# Altium PCB GATE_BOARD.PcbDoc
Units mm, origin at the board's own origin, x right, y up, seen from the top; angles counter-clockwise.
Board outline 34 x 31 mm, 2 copper layers (Top Layer, Bottom Layer), stack 1.071 mm thick; 20 components, 10 nets, 36 pads, 0 vias.
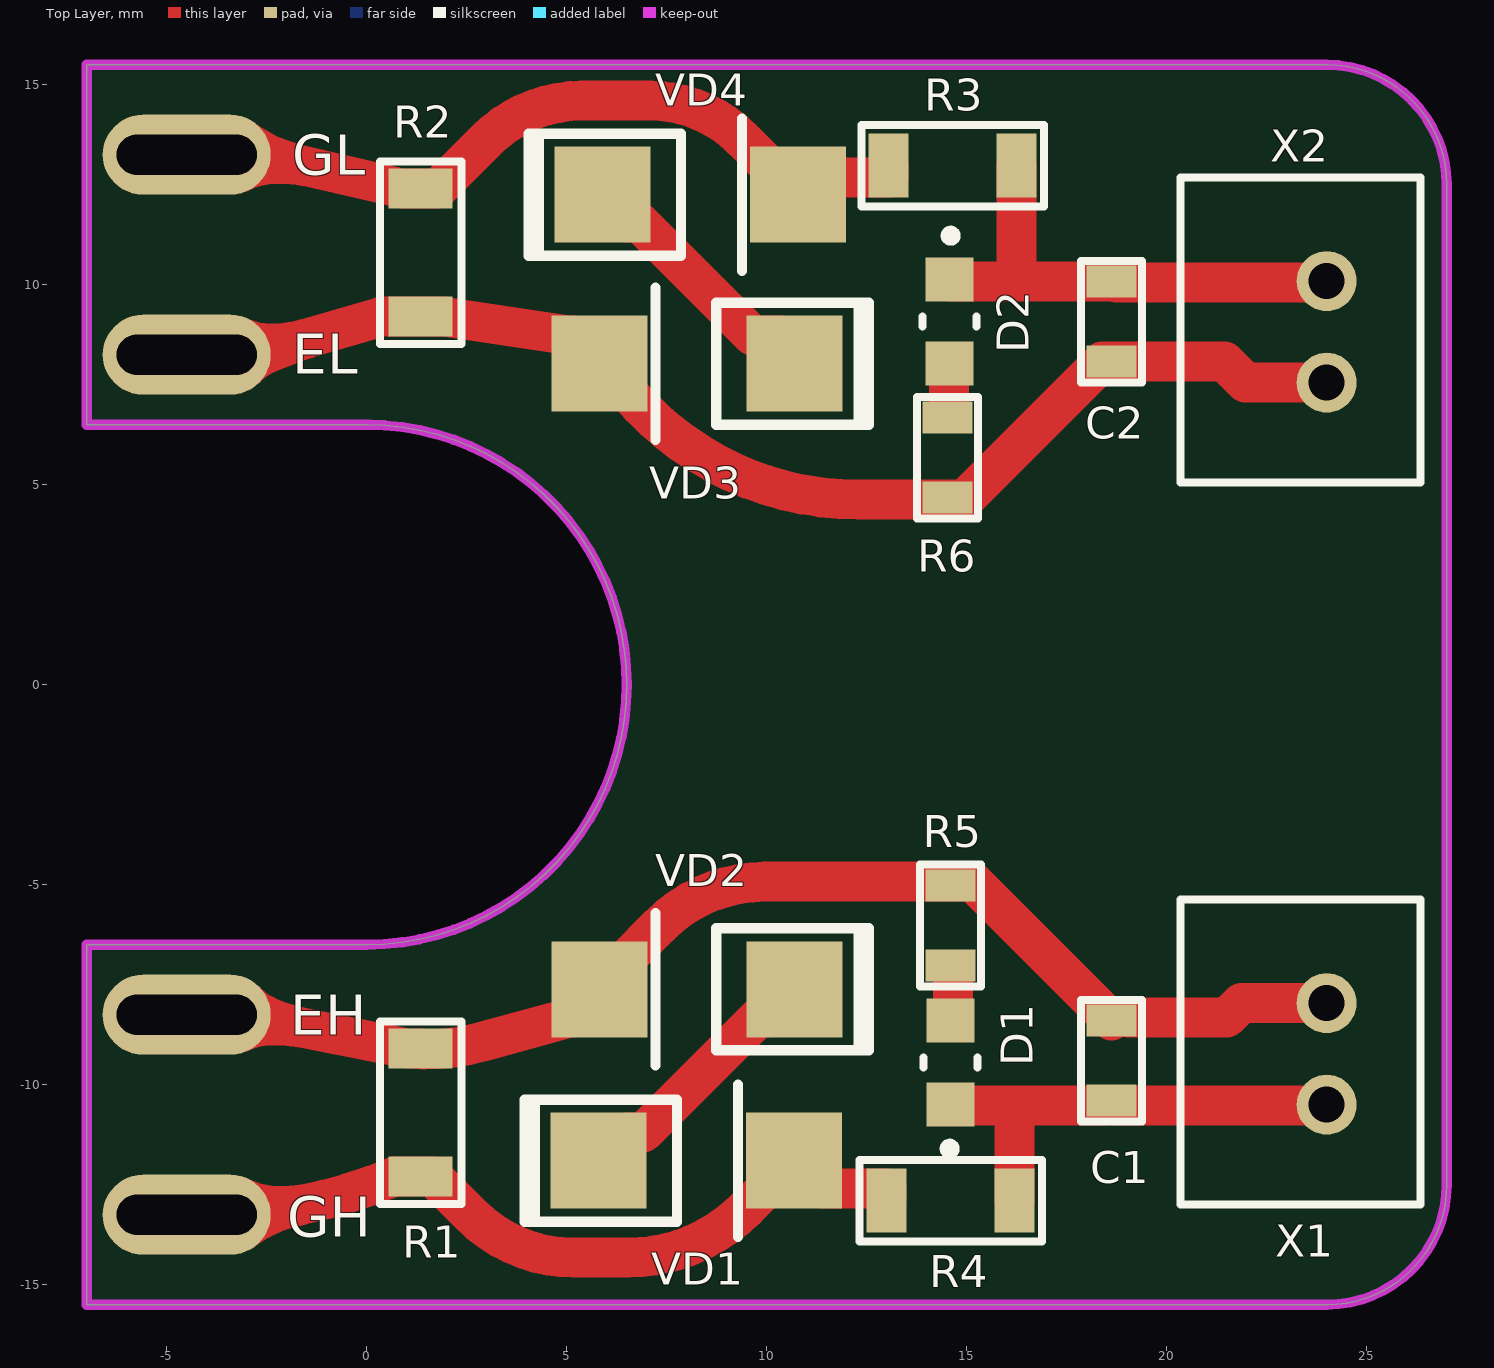
[diagram p0: Top Layer view]
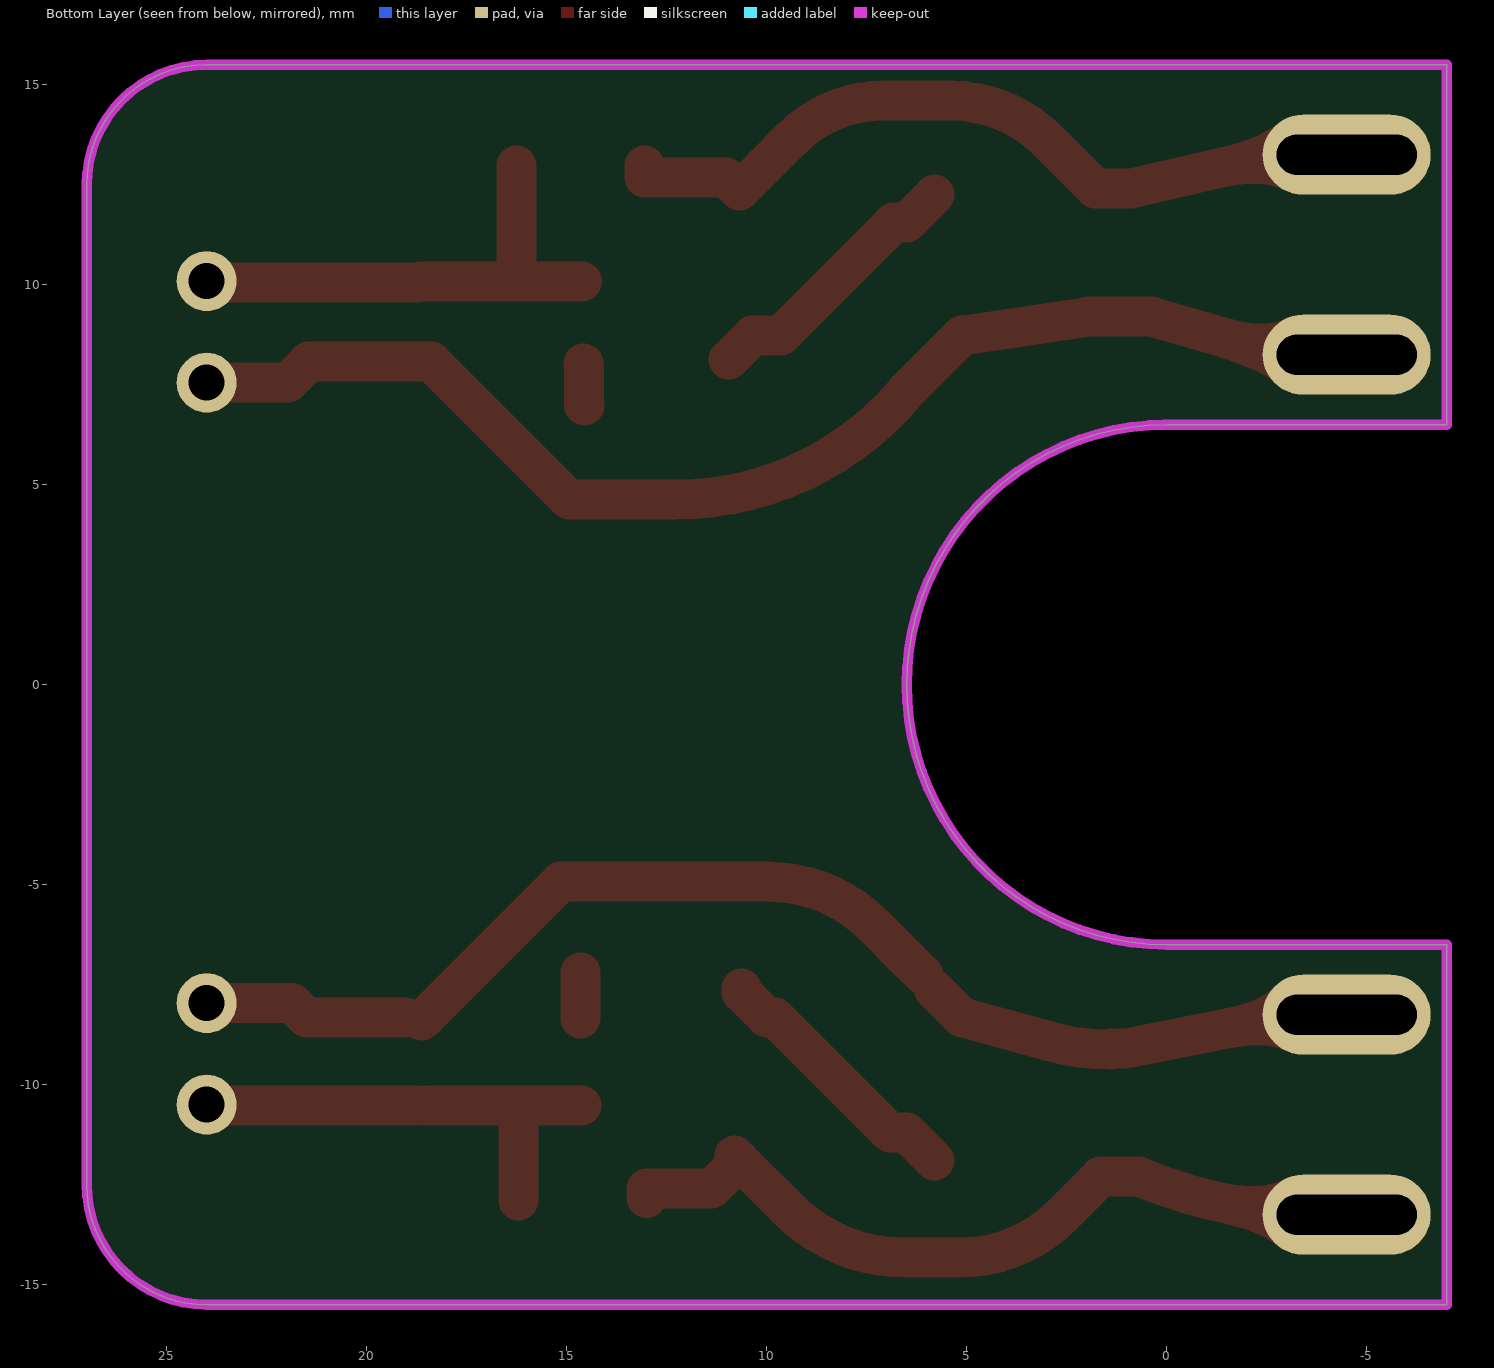
[diagram p1: Bottom Layer view, seen from below]
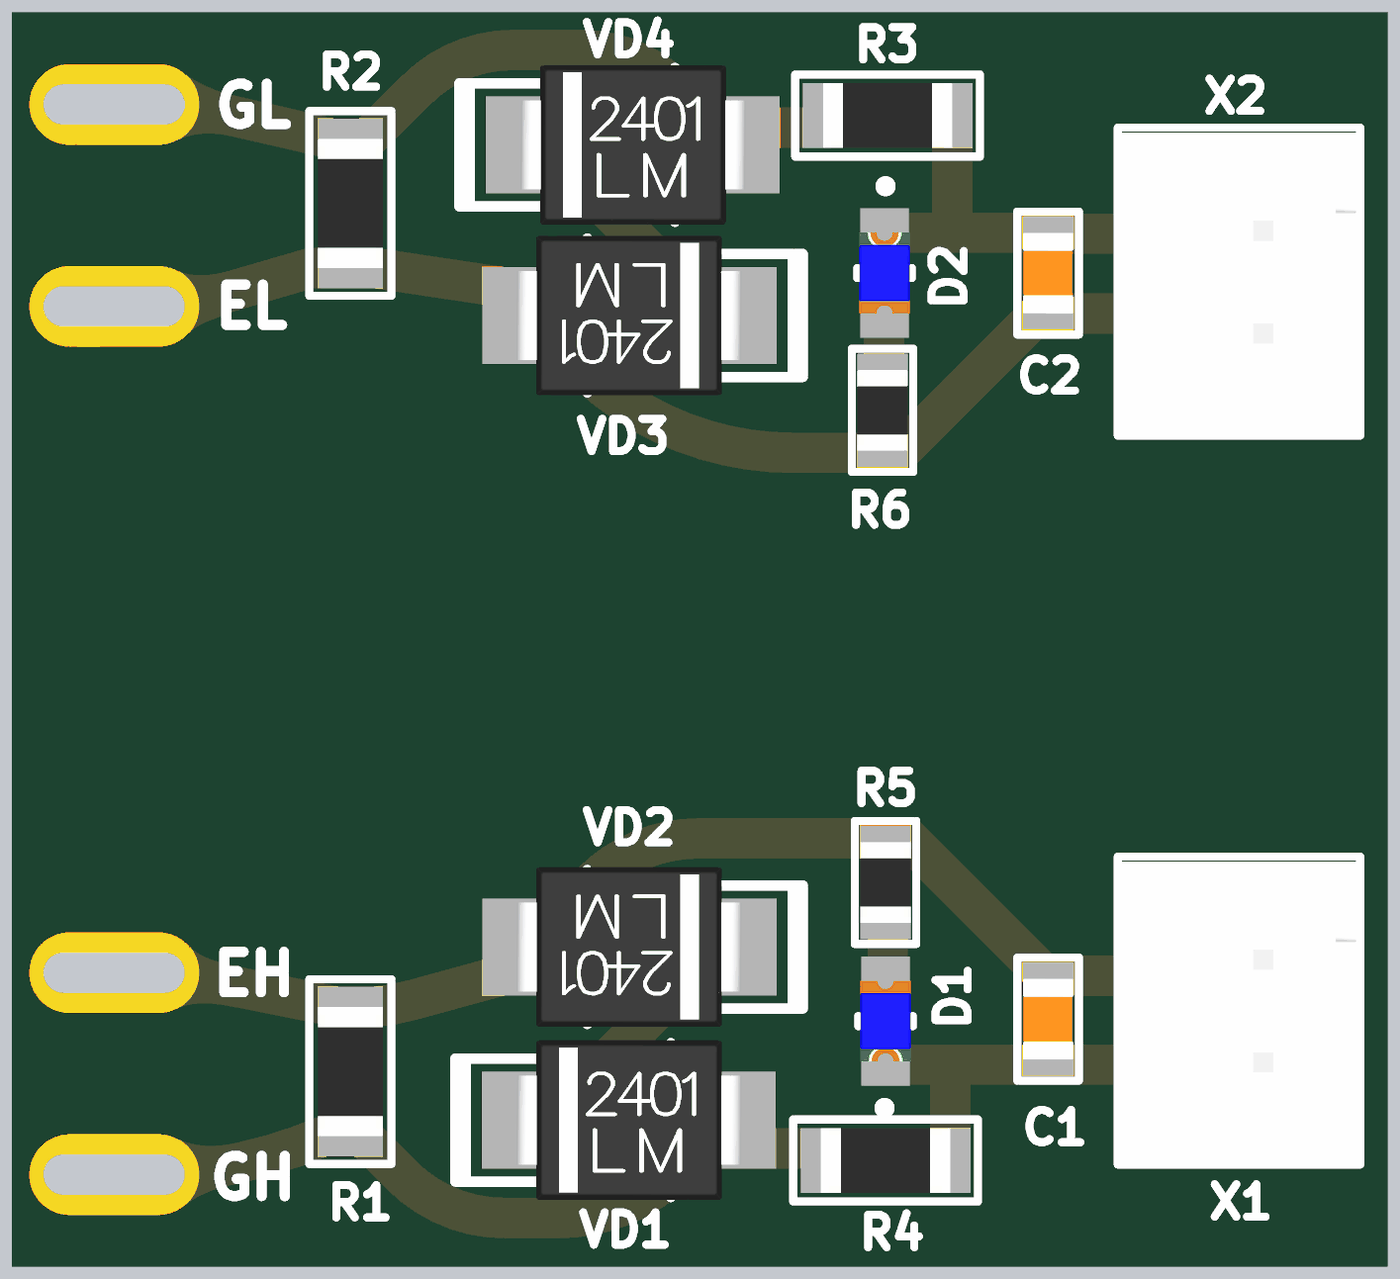
[diagram p2: 3D render of the assembled board from above, using the file's embedded part models]

## Layer stack, top to bottom
Top Solder: solder mask 0.0102, Solder Resist, Dk 3.5
Top Layer: signal copper 0.0356
Dielectric 1: dielectric 1, FR-4, Dk 4.8
Bottom Layer: signal copper 0.0356
Bottom Solder: solder mask 0.0102, Solder Resist, Dk 3.5

## Board outline
-7,-15.5 -7,-6.5 0,-6.5 ccw(c0,0) 0,6.5 -7,6.5 -7,15.5 24,15.5 cw(c24,12.5) 27,12.5 27,-12.5 cw(c24,-12.5) 24,-15.5

## Design rules (kind name [scope] priority, off if disabled: settings)
Clearance Clearance_1 [All vs InNet('GND_1')] p1: gap=0.2 ignorepadtopadclearanceinfootprint=FALSE
Clearance [All vs InNet('GND')] p2: gap=0.25 ignorepadtopadclearanceinfootprint=FALSE except(0.2: SMDPad-SMDPad SMDPad-THPad SMDPad-Via SMDPad-Fill SMDPad-Poly SMDPad-Region SMDPad-Text SMDPad-Hole THPad-THPad THPad-Via THPad-Fill THPad-Poly THPad-Region THPad-Text THPad-Hole Text-Text Text-Hole)
ComponentClearance [All] p1: gap=-3 collisioncheckmode=3 verticalgap=0.254 showdistances=FALSE
DiffPairsRouting [All] p1: maxlimit=0.254 minlimit=0.254 mostfreqgap=0.254 substack1={A23D90DD-733B-49C5-8102-56B3D284E3A0} toplayer_{a23d90dd-733b-49c5-8102-56b3d284e3a0}_minwidth=0.381 toplayer_{a23d90dd-733b-49c5-8102-56b3d284e3a0}_maxwidth=0.381 toplayer_{a23d90dd-733b-49c5-8102-56b3d284e3a0}_prefwidth=0.381 bottomlayer_{a23d90dd-733b-49c5-8102-56b3d284e3a0}_minwidth=0.381 bottomlayer_{a23d90dd-733b-49c5-8102-56b3d284e3a0}_maxwidth=0.381 bottomlayer_{a23d90dd-733b-49c5-8102-56b3d284e3a0}_prefwidth=0.381 toplayer_minwidth=0.381 toplayer_maxwidth=0.381 toplayer_prefwidth=0.381 bottomlayer_minwidth=0.381 bottomlayer_maxwidth=0.381 bottomlayer_prefwidth=0.381 substack2={0B3DB408-A969-412D-8C07-BA8AE97219D9} toplayer_{0b3db408-a969-412d-8c07-ba8ae97219d9}_minwidth=0.381 toplayer_{0b3db408-a969-412d-8c07-ba8ae97219d9}_maxwidth=0.381 toplayer_{0b3db408-a969-412d-8c07-ba8ae97219d9}_prefwidth=0.381 bottomlayer_{0b3db408-a969-412d-8c07-ba8ae97219d9}_minwidth=0.381 bottomlayer_{0b3db408-a969-412d-8c07-ba8ae97219d9}_maxwidth=0.381 bottomlayer_{0b3db408-a969-412d-8c07-ba8ae97219d9}_prefwidth=0.381 substack3={378827E6-B38F-4565-9D2F-710D8D441C30} toplayer_{378827e6-b38f-4565-9d2f-710d8d441c30}_minwidth=0.381 toplayer_{378827e6-b38f-4565-9d2f-710d8d441c30}_maxwidth=0.381 toplayer_{378827e6-b38f-4565-9d2f-710d8d441c30}_prefwidth=0.381 bottomlayer_{378827e6-b38f-4565-9d2f-710d8d441c30}_minwidth=0.381 bottomlayer_{378827e6-b38f-4565-9d2f-710d8d441c30}_maxwidth=0.381 bottomlayer_{378827e6-b38f-4565-9d2f-710d8d441c30}_prefwidth=0.381 substack4={1E65D4A7-266F-4925-B814-5E9C4A66F8EE} toplayer_{1e65d4a7-266f-4925-b814-5e9c4a66f8ee}_minwidth=0.381 toplayer_{1e65d4a7-266f-4925-b814-5e9c4a66f8ee}_maxwidth=0.381 toplayer_{1e65d4a7-266f-4925-b814-5e9c4a66f8ee}_prefwidth=0.381 bottomlayer_{1e65d4a7-266f-4925-b814-5e9c4a66f8ee}_minwidth=0.381 bottomlayer_{1e65d4a7-266f-4925-b814-5e9c4a66f8ee}_maxwidth=0.381 bottomlayer_{1e65d4a7-266f-4925-b814-5e9c4a66f8ee}_prefwidth=0.381 substack5={93C5D03E-862D-45F8-9871-970EEA9B3F11} toplayer_{93c5d03e-862d-45f8-9871-970eea9b3f11}_minwidth=0.381 toplayer_{93c5d03e-862d-45f8-9871-970eea9b3f11}_maxwidth=0.381 toplayer_{93c5d03e-862d-45f8-9871-970eea9b3f11}_prefwidth=0.381 bottomlayer_{93c5d03e-862d-45f8-9871-970eea9b3f11}_minwidth=0.381 bottomlayer_{93c5d03e-862d-45f8-9871-970eea9b3f11}_maxwidth=0.381 bottomlayer_{93c5d03e-862d-45f8-9871-970eea9b3f11}_prefwidth=0.381 maxuncoupledlength=12.7
Height [All] p1: minheight=0 maxheight=50 prefheight=33
HoleSize [All] p1: absolutevalues=TRUE maxlimit=6 minlimit=0.01 maxpercent=80.000 minpercent=20.000
HoleToHoleClearance [All] p1: gap=0.1 allowstackedmicrovias=TRUE
MinimumSolderMaskSliver [All] p1: minsoldermaskwidth=0.1
PlaneClearance [All] p1: clearance=0.7
PlaneConnect [All] p1: planeconnectstyle=Direct reliefexpansion=0.5 reliefentries=4 reliefconductorwidth=0.5 reliefairgap=0.15
PolygonConnect VQFN20 [HasFootprint('VQFN20')] p1: connectstyle=Direct reliefconductorwidth=0.254 reliefentries=4 polygonreliefangle="90 Angle" airgapwidth=0.254
PolygonConnect [All] p2: connectstyle=Direct reliefconductorwidth=0.3 reliefentries=4 polygonreliefangle="90 Angle" airgapwidth=0.15
RoutingVias [All] p1: holewidth=0.1 width=0.1 viastyle="Through Hole" minholewidth=0 minwidth=0.3 maxholewidth=2 maxwidth=4
ShortCircuit [All] p1: allowed=TRUE
SilkToSolderMaskClearance [IsPad] p1: minsilkscreentomaskgap=0.1 clearancetoexposedcopper=TRUE
SolderMaskExpansion SolderMaskExpansion_Via [IsVia] p1: expansion=0.102 istentingtop=TRUE
SolderMaskExpansion [All] p2: expansion=0.01 istentingtop=FALSE
UnRoutedNet [All] p1: checkbadconnections=TRUE
Width [All] p1: maxlimit=5 minlimit=0.2 preferedwidth=0.3 substack1={A23D90DD-733B-49C5-8102-56B3D284E3A0} substack2={0B3DB408-A969-412D-8C07-BA8AE97219D9} substack3={378827E6-B38F-4565-9D2F-710D8D441C30} substack4={1E65D4A7-266F-4925-B814-5E9C4A66F8EE} substack5={93C5D03E-862D-45F8-9871-970EEA9B3F11}
19 further rules are at their usual default settings.

## Components (designator, comment, footprint, x,y, rotation, side; value= is the part's Value field where it differs from the comment)
C1 "330" CAP-0805 18.625,-9.4 r270 top
C2 "330" CAP-0805 18.625,9.075 r270 top
D1 "LED" LED_BLUE 14.6,-9.45 r90 top
D2 "LED" LED_BLUE 14.575,9.075 r270 top
EH "" Test_Point#1 -2.7,-9.7 r0 top
EL "" Test_Point#2 -3,9.275 r0 top
GH "" Test_Point#3 -2.775,-12.775 r0 top
GL "" Test_Point#4 -3.35,12.975 r0 top
R1 "5.1K" RES-1206 1.35,-10.7 r270 top
R2 "5.1K" RES-1206 1.35,10.8 r90 top locked
R3 "5.1" RES-1206 14.65,12.975 r0 top
R4 "5.1" RES-1206 14.6,-12.9 r0 top
R5 "1K" RES-0805 14.6,-6.015 r90 top
R6 "1K" RES-0805 14.525,5.675 r270 top
VD1 "5.0V" DO-214AA 10.3,-11.9 r180 top
VD2 "5.0V" DO-214AA 6.2,-7.614 r0 top
VD3 "5.0V" DO-214AA 6.2,8.025 r0 top
VD4 "5.0V" DO-214AA 10.4,12.25 r180 top
X1 "CONN-2-PIN" CONN-PLS-2-2.54mm 24,-10.5 r90 top
X2 "CONN-2-PIN" CONN-PLS-2-2.54mm 24,7.551 r90 top

## Footprints (in the part's own frame and the unit in brackets; to place one, negate y for a bottom-side part, rotate by r counter-clockwise, add the part's x,y. Pads: shape width x height; smd on the part's side, far side on the other; paste and mask are expansions set on the pad)
CAP-0805 [mm]
  rect 0.8x1.25 smd mask+0.015: 1(-1,0) 2(1,0)
  silkscreen extent -1.52,-0.76 1.52,0.76, body extent -1,-0.62 1,0.63, height 0.8
CONN-PLS-2-2.54mm [mm]
  round 1.5 hole 0.9: 1(0,0) 2(2.54,0)
  silkscreen extent -2.5,-2.35 5.13,3.65, body extent -2.4,-2.25 5,3.55, height 7
DO-214AA [mm]
  rect 2.4x2.4 smd: 1(-0.381,0) 2(4.5,0)
  silkscreen extent 1.02,-1.91 6.35,1.91, body extent -0.75,-1.97 4.85,1.97, height 2.65
LED_BLUE [mm]
  rect 1.1x1.2 smd paste+0 mask+0: 1(-1.05,0) 2(1.05,0)
  silkscreen extent -2.27,-0.67 0.13,0.67, body extent -1,-0.63 1,0.63, height 0.8
RES-0805 [mm]
  rect 0.8x1.25 smd mask+0.015: 1(-1,0) 2(1,0)
  silkscreen extent -1.52,-0.76 1.52,0.76, body extent -1,-0.62 1,0.63, height 0.6
RES-1206 [mm]
  rect 1x1.6 smd: 1(-1.6,0) 2(1.6,0)
  silkscreen extent -2.29,-1.02 2.29,1.02, body extent -1.6,-0.8 1.6,0.8, height 0.6
Test_Point#1 [mm]
  oval 4.2x2 hole 1 slot 3.5 at 0 deg: 1(-1.8,1.45)
Test_Point#2 [mm]
  oval 4.2x2 hole 1 slot 3.5 at 0 deg: 1(-1.5,-1.025)
Test_Point#3 [mm]
  oval 4.2x2 hole 1 slot 3.5 at 0 deg: 1(-1.725,-0.475)
Test_Point#4 [mm]
  oval 4.2x2 hole 1 slot 3.5 at 0 deg: 1(-1.15,0.275)

## Part data
C1 C2: library part CAP-NON-POLAR
D1 D2: "WURTH ELEKTRONIK - 151031YS06000 - LED, Yellow, Through Hole, T-1 (3mm), 30 mA, 2 V, 590 nm", Manufacturer_Name="Wurth Elektronik", Manufacturer_Part_Number=151031YS06000, Mouser Part Number=710-151031YS06000, Datasheet Link=https://katalog.we-online.de/led/datasheet/151031YS06000.pdf, Geometry.Height=5.5mm, Mouser Price/Stock=https://www.mouser.co.uk/ProductDetail/Wurth-Elektronik/151031YS06000?qs=LlUlMxKIyB3xSYYW%252BcuBiQ%3D%3D
EH EL GH GL: library part TP_PCB?, "Test_Point"
R1 R2 R3 R4 R5 R6: library part RES-CONST
VD1 VD2 VD3 VD4: library part SMBJ15A

## Nets (pads, with @x,y where several pads share a name; then routed paths per layer and width w, separated by ;. In a path a pad name is that pad's centre, name@x,y a point inside that pad or via, vN(x,y) a via of type N, cw(c..) or ccw(c..) an arc to the next point about the centre after c; other vN are vias at no path point)
E_H: C1.1 EH.1 R1.1 R5.2 VD2.1 X1.2 | length 30.6
  Top Layer w1: EH.1 -4.235,-8.25 -4.16,-8.175 -3.625,-8.175 1.05,-9.1 R1.1 ; R1.1@1.405,-9.123 ccw(c1.401,-3.423) 2.909,-8.92 5.119,-8.314 VD2.1 ; VD2.1@6.081,-7.263 6.444,-6.9 7.329,-6.015 cw(c9.961,-8.649) 9.961,-4.925 R5.2@14.51,-4.925 ; R5.2@14.6,-4.925 15.15,-4.925 18.5,-8.275 18.5,-8.3 18.525,-8.3 C1.1 ; C1.1@19.039,-8.325 21.5,-8.325 21.865,-7.96 X1.2
NetC1_2: C1.2 D1.1 R4.2 X1.1 | length 11.6
  Top Layer w1: D1.1@14.625,-10.525 16.2,-10.525 ; R4.2 16.2,-10.525 ; C1.2@18.45,-10.525 16.2,-10.525 ; C1.2@18.7,-10.525 23.74,-10.525 23.865,-10.4 X1.1@24,-10.4
NetC2_1: C2.1 D2.1 R3.2 X2.2 | length 12.1
  Top Layer w1: D2.1@14.612,10.075 16.25,10.075 ; R3.2 16.25,10.075 ; C2.1 16.25,10.075 ; C2.1@18.75,10.05 X2.2@23.959,10.05
NetC2_2: C2.2 EL.1 R2.1 R6.2 VD3.1 X2.1 | length 31.6
  Top Layer w1: EL.1@-4.475,8.225 -3.453,8.225 ccw(c-3.455,11.554) -2.526,8.357 0.372,9.2 1.078,9.2 R2.1 1.943,9.2 5.119,8.725 VD3.1 6.519,7.325 ccw(c12.302,12.169) 12.302,4.625 R6.2@14.4,4.625 ; R6.2@14.525,4.625 14.936,4.625 18.386,8.075 21.45,8.075 21.974,7.551 X2.1
NetD1_2: D1.2 R5.1 | length 1.1
  Top Layer w1: D1.2@14.655,-8.345 R5.1@14.655,-7.2
NetD2_2: D2.2 R6.1 | length 1.1
  Top Layer w1: R6.1@14.55,6.975 14.562,6.987 14.562,7.925 14.564,7.975 D2.2
NetGH_1: GH.1 R1.2 R4.1 VD1.1 | length 19.7
  Top Layer w1: GH.1 -4.074,-13.25 ccw(c-4.082,-0.77) 0.693,-12.3 1.05,-12.3 R1.2 1.65,-12.3 2.617,-13.267 ccw(c5.173,-10.707) 5.178,-14.325 6.529,-14.325 6.531,-14.325 ccw(c6.531,-10.161) 9.476,-13.105 VD1.1 ; VD1.1@10.806,-11.775 10.806,-12.025 11.381,-12.6 11.967,-12.6 13,-12.6 R4.1@13,-12.834
NetGL_1: GL.1 R2.2 R3.1 VD4.1 | length 19.6
  Top Layer w1: GL.1@-4.45,13.3 -3.001,13.3 0.896,12.4 R2.2 1.775,12.4 2.984,13.609 cw(c5.376,11.217) 5.376,14.6 7.083,14.6 cw(c7.083,11.345) 9.383,13.648 10.081,12.95 10.681,12.35 11.006,12.675 13.05,12.675 R3.1
NetVD1_2: VD1.2 VD2.2 | length 6.7
  Top Layer w1: VD1.2 6.5,-11.2 6.912,-11.2 9.798,-8.314 10,-8.314 10.625,-7.689 VD2.2@10.625,-7.6
NetVD3_2: VD3.2 VD4.2 | length 6.9
  Top Layer w1: VD4.2@5.8,12.25 6.5,11.55 6.825,11.55 9.65,8.725 10.35,8.725 VD3.2@10.95,8.125

## Keep-outs
Keep-Out Layer:
  lines w0.254: -7,-6.524 -7,-15.5 24,-15.5 ccw(c24,-12.5) 27,-12.5 27,12.5 ccw(c24,12.5) 24,15.5 -7,15.5 -7,6.5 0.075,6.5 ; -7,-6.5 0,-6.5 ccw(c0,0) 0,6.5